# EAGLE board board (EAGLE 7.4.0)

No outline drawn. Coordinates in mm, seen from the top.
Copper layers (1*16): Top 0.035mm / dielectric 1.5mm / Bottom 0.035mm
Design rules "default": minimum track width 10mil, minimum drill 24mil, track to track 8mil, track to pad 8mil, pad to pad 8mil, via to via 8mil, smd to smd 8mil, copper to edge 40mil, drill to drill 8mil, minimum pad ring 10mil, minimum via ring 8mil, stop-mask expansion 4mil, vias tented up to drill 0mil, thermal gap 10mil

## Footprints (pad centres in the part's own frame; a part is rotated, then mirrored left to right if it is on the bottom)
CAP-PTH-SMALL = drill 0.7 pad 1.651: 1 0,0; 2 2.54,0
LED5MM = drill 0.813 pad 1.88: A -1.27,0; K 1.27,0
1X06_LOCK = drill 1.016 pad 1.88: 1 0,0; 2 2.54,-0.254; 3 5.08,0; 4 7.62,-0.254; 5 10.16,0; 6 12.7,-0.254
2X20_SHROUDED = drill 1.016 pad 1.88 octagon: 1 -1.27,24.13; 2 1.27,24.13; 3 -1.27,21.59; 4 1.27,21.59; 5 -1.27,19.05; 6 1.27,19.05; 7 -1.27,16.51; 8 1.27,16.51; 9 -1.27,13.97; 10 1.27,13.97; 11 -1.27,11.43; 12 1.27,11.43; 13 -1.27,8.89; 14 1.27,8.89; 15 -1.27,6.35; 16 1.27,6.35; 17 -1.27,3.81; 18 1.27,3.81; 19 -1.27,1.27; 20 1.27,1.27; 21 -1.27,-1.27; 22 1.27,-1.27; 23 -1.27,-3.81; 24 1.27,-3.81; 25 -1.27,-6.35; 26 1.27,-6.35; 27 -1.27,-8.89; 28 1.27,-8.89; 29 -1.27,-11.43; 30 1.27,-11.43; 31 -1.27,-13.97; 32 1.27,-13.97; 33 -1.27,-16.51; 34 1.27,-16.51; 35 -1.27,-19.05; 36 1.27,-19.05; 37 -1.27,-21.59; 38 1.27,-21.59; 39 -1.27,-24.13; 40 1.27,-24.13
TACTILE-PTH = drill 1.016 pad 1.88: 1 -3.251,2.261; 2 3.251,2.261; 3 -3.251,-2.261; 4 3.251,-2.261

## Placement (x,y rotation side)
C1  10nF  [CAP-PTH-SMALL]  -39.37,-54.61 0 top
C2  10nF  [CAP-PTH-SMALL]  -39.37,-58.42 0 top
D1  [LED5MM]  -36.83,-25.4 0 top
D2  [LED5MM]  -36.83,-33.02 0 top
DOOR  [1X06_LOCK]  -38.1,-40.64 0 top
FRAME1  FRAME-LETTER  [CREATIVE_COMMONS]  -19.05,-20.32 0 top
GSM  [1X06_LOCK]  -38.1,-50.8 0 top
J1  M20X2SHROUDED  [2X20_SHROUDED]  -17.78,17.78 0 top
RFID  [1X06_LOCK]  -38.1,-45.72 0 top
S1  SWITCH-MOMENTARY-2PTH  [TACTILE-PTH]  -27.94,-8.89 0 top
S2  SWITCH-MOMENTARY-2PTH  [TACTILE-PTH]  -36.83,-8.89 0 top

## Library data of the parts
C1 C2 = SparkFun-Passives
D1 D2 = SparkFun-LED
DOOR GSM RFID = SparkFun-Connectors
FRAME1 = SparkFun-Aesthetics
J1 = SparkFun-Connectors; PROD_ID: CONN-12263
S1 S2 = SparkFun-Electromechanical; PROD_ID: SWCH-08441

## Nets
+3V3_0: J1.1
+3V3_1: J1.17
+5V_0: J1.2
+5V_1: J1.4
DOOR_SWITCH: DOOR.5 J1.32
GND: DOOR.4 GSM.1 RFID.2
GND0: J1.9
GND1: J1.25
GND2: J1.39
GND3: J1.6
GND4: J1.14
GND5: J1.20
GND6: J1.30
GND7: J1.34
GPIO1: J1.28
GPIO2: J1.3
GPIO3: J1.5
GPIO4: J1.7
GPIO5: J1.29
GPIO6: J1.31
GPIO7: J1.26
GPIO8: J1.24
GPIO09: J1.21
GPIO10: J1.19
GPIO11: J1.23
GPIO13: J1.33
GPIO16: J1.36
GPIO17: J1.11
GPIO19: J1.35
GPIO22: J1.15
GPIO26: J1.37
GPIO27: J1.13
LCK: DOOR.2 J1.38
N$1: DOOR.6
N$13: GSM.6
N$14: GSM.5
N$19: C1.2 S1.1
N$20: C1.1 S1.3
N$21: C2.1 S2.1
N$22: C2.2 S2.3
RXD0: GSM.4 J1.10
SSEL: J1.12
SW_MISO: J1.18 RFID.5
SW_MOSI: J1.16 RFID.4
SW_SCLK: J1.22 RFID.6
SW_SSEL: RFID.3
TXD0: GSM.3 J1.8
UNLCK: DOOR.3 J1.40
VCC: DOOR.1 GSM.2 RFID.1

## Tracks (layer width: path | path; a pad name or v marks a point on that pad's centre or on a via)
DOOR_SWITCH  (1 unrouted)
GND  (2 unrouted)
LCK  (1 unrouted)
N$19  (1 unrouted)
N$20  (1 unrouted)
N$21  (1 unrouted)
N$22  (1 unrouted)
RXD0  (1 unrouted)
SW_MISO  (1 unrouted)
SW_MOSI  (1 unrouted)
SW_SCLK  (1 unrouted)
TXD0  (1 unrouted)
UNLCK  (1 unrouted)
VCC  (2 unrouted)